# Altium PCB KATADC_V1-3.PcbDoc (part 5 of 7)
Units mm, origin at the board's own origin, x right, y up, seen from the top; angles counter-clockwise.
Board outline 127 x 85.85 mm, 6 copper layers (Top Layer, InnerPlane1, InnerPlane2, InnerPlane3, InnerPlane4, Bottom Layer), stack 1.255 mm thick; 189 components, 188 nets, 905 pads, 1090 vias.
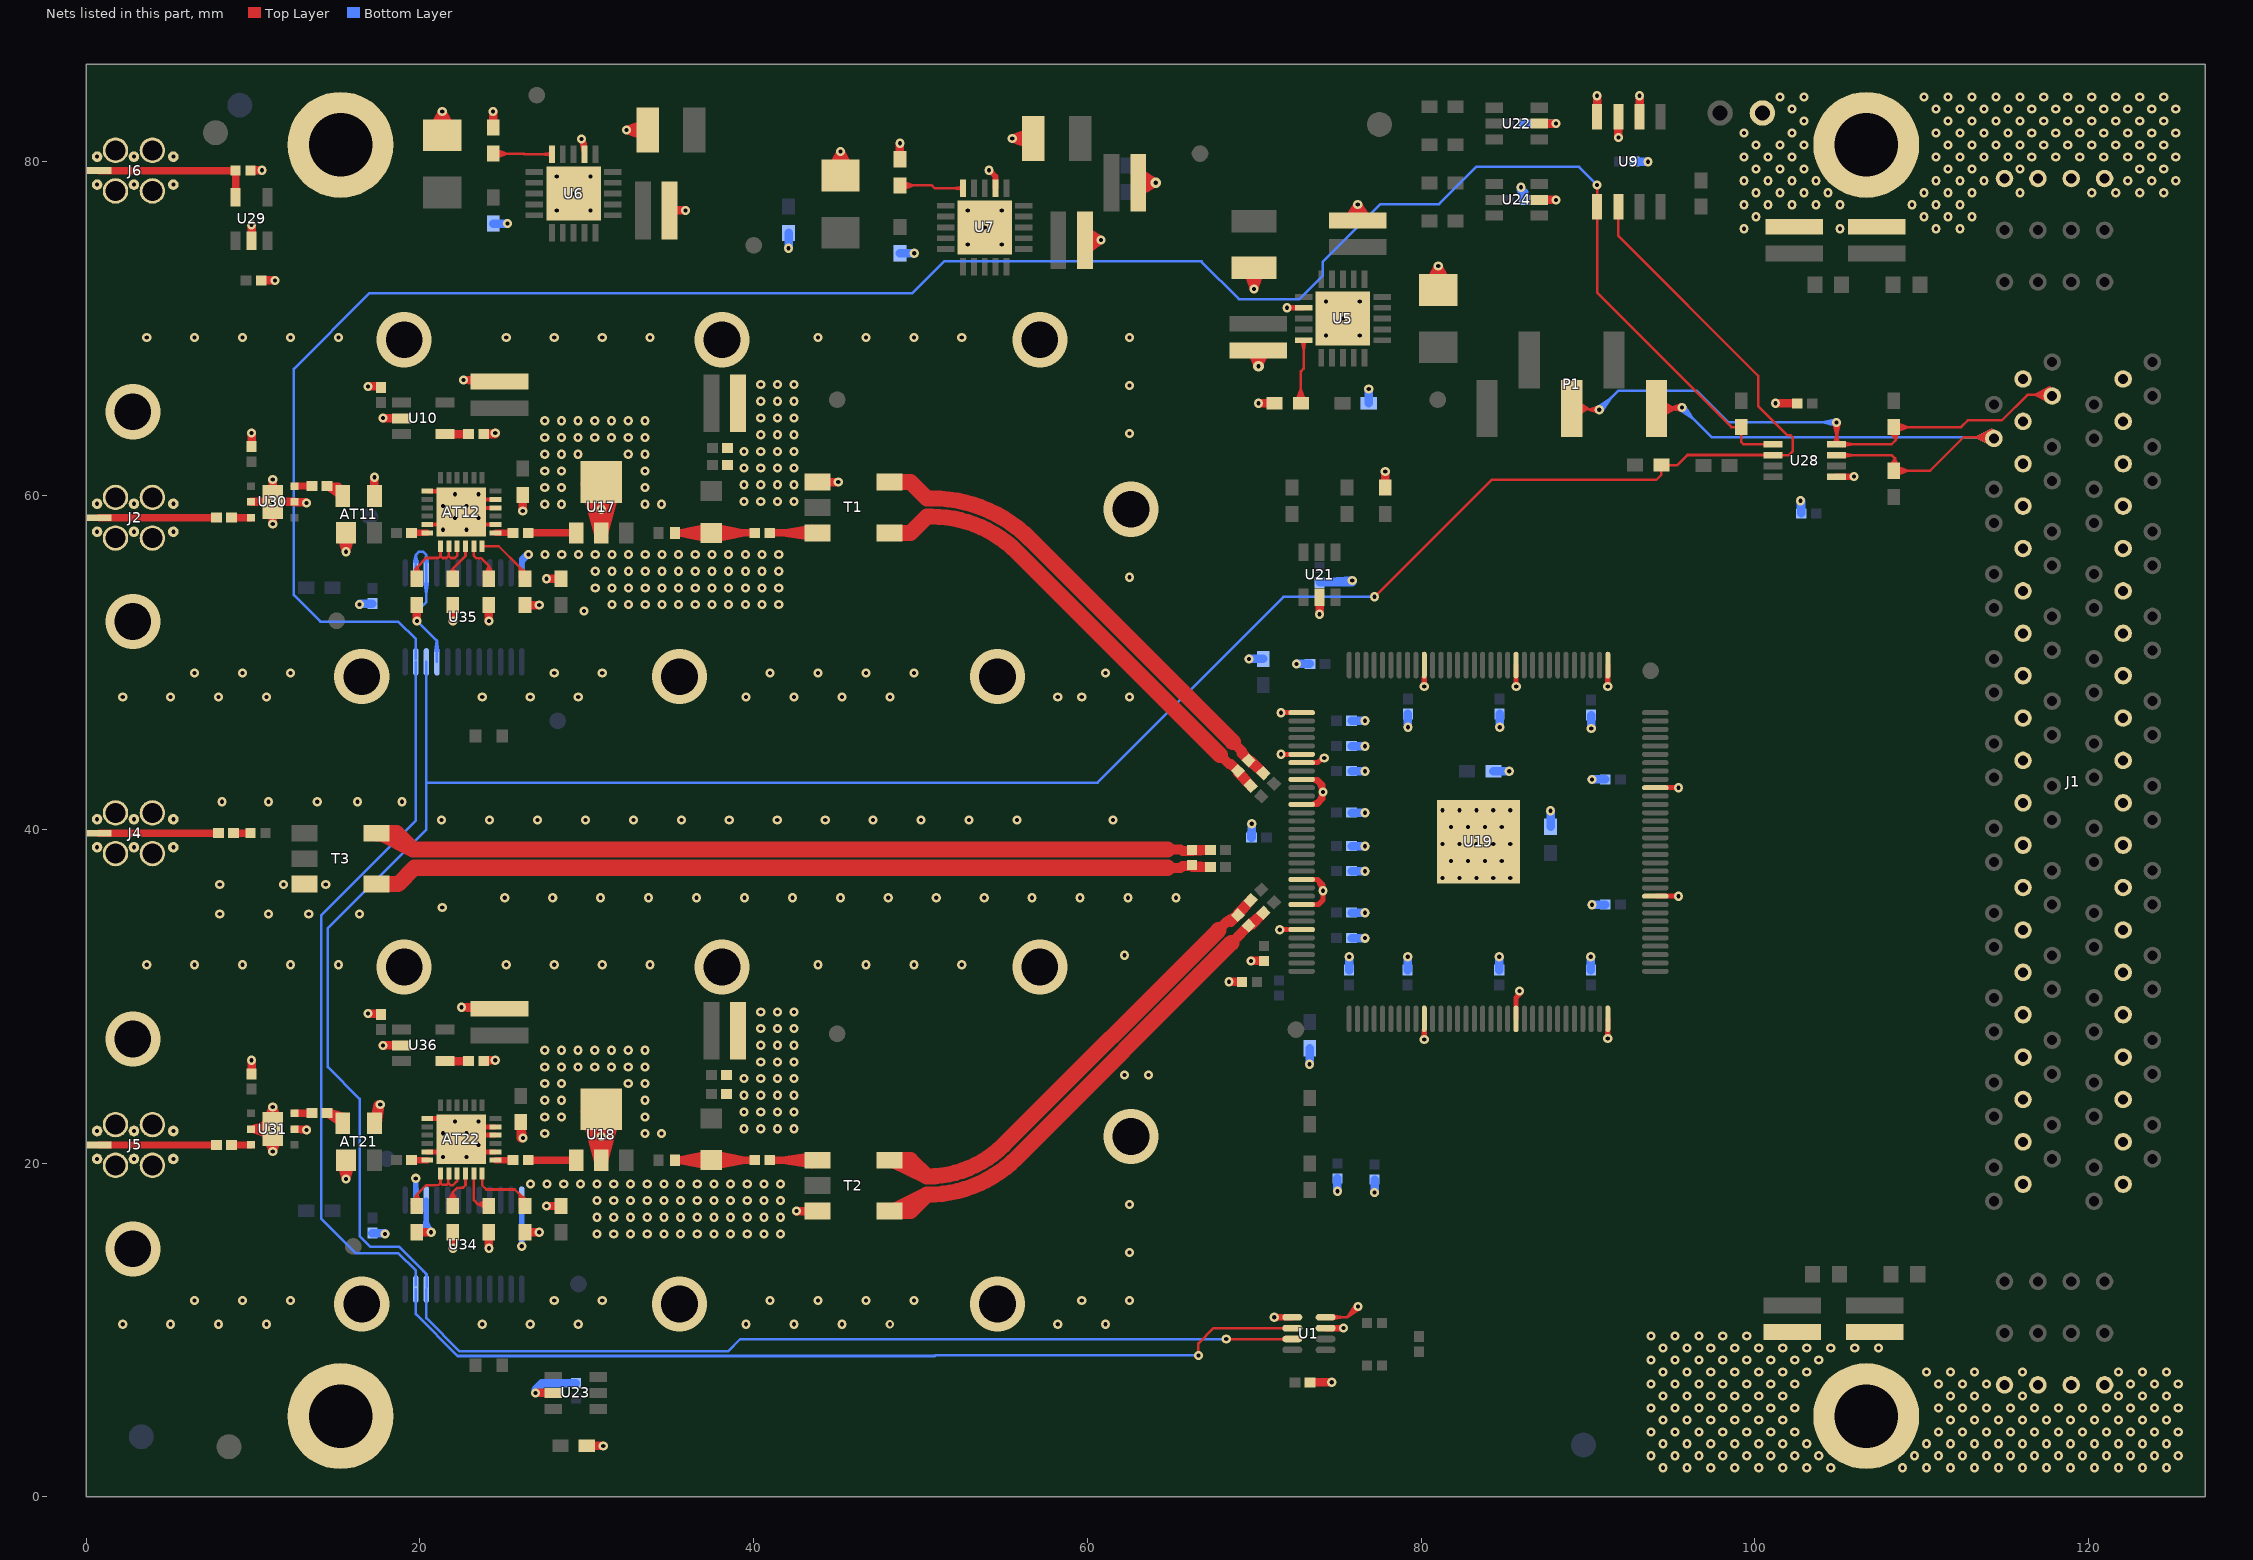
[diagram p9: the nets of this part, all layers, seen from the top]

## Via types
v1: diameter 0.55, hole 0.25, Top Layer to Bottom Layer, tented both sides, 1066 vias
v2: diameter 3.302, hole 2.2, Top Layer to Bottom Layer, tented both sides, 18 vias
v3: diameter 0.65, hole 0.25, Top Layer to Bottom Layer, tented both sides, 4 vias
v4: diameter 0.51, hole 0.25, Top Layer to Bottom Layer, tented both sides, 1 vias
v5: diameter 0.55, hole 0.25, Top Layer to Bottom Layer, 1 vias

## Nets (pads, with @x,y where several pads share a name; then routed paths per layer and width w, separated by ;. In a path a pad name is that pad's centre, name@x,y a point inside that pad or via, vN(x,y) a via of type N, cw(c..) or ccw(c..) an arc to the next point about the centre after c; other vN are vias at no path point) (continued)
GND: AT11.1 AT11.3 AT12.1 AT12.5 AT12.14 AT12.16 AT12.17 AT12.25 AT21.1 AT21.3 AT22.1 AT22.5 AT22.14 AT22.16 AT22.17 AT22.25 C1.2 C2.2 C3.2 C4.2 C5.2 C6.2 C7.2 C8.2 C9.1 C10.1 C11.1 C12.2 C16.2 C17.2 C19.2 C20.2 C21.2 C22.2 C26.2 C27.2 C28.1 C29.1 C30.1 C31.1 C32.2 C34.2 C35.2 C36.2 C37.1 C38.1 C39.2 C59.2 C60.2 C63.2 C65.2 C66.2 C67.2 C68.2 C71.2 C72.2 C74.2 C76.2 C78.2 C79.1 C80.2 C81.2 C82.2 C83.2 C84.2 C85.2 C86.2 C87.2 C88.2 C89.2 C90.2 C91.2 C92.2 C93.2 C96.2 C97.2 C98.2 C99.2 C100.2 C101.2 C102.2 C103.2 C104.2 C105.1 C106.1 C107.1 C108.2 C109.2 C110.2 C111.2 C112.2 C113.2 C114.2 C115.2 C116.2 H1.1 H2.1 H3.1 H4.1 J1.B1 J1.B2 J1.B3 J1.B4 J1.B5 J1.B6 J1.B7 J1.B8 J1.B9 J1.B10 J1.B11 J1.B12 J1.B13 J1.B14 J1.B15 J1.B16 J1.B17 J1.B18 J1.B19 J1.B20 J1.E1 J1.E2 J1.E3 J1.E4 J1.E5 J1.E6 J1.E7 J1.E8 J1.E9 J1.E10 J1.E11 J1.E12 J1.E13 J1.E14 J1.E15 J1.E16 J1.E17 J1.E18 J1.E19 J1.E20 J1.W1 J1.W6 J1.X1 J1.X6 J1.Y1 J1.Y6 J1.Z1 J1.Z6 J2.2 J2.3 J2.4 J2.5 J2.6 J2.7 J2.8 J2.9 J2.10 J2.11 J4.2 J4.3 J4.4 J4.5 J4.6 J4.7 J4.8 J4.9 J4.10 J4.11 J5.2 J5.3 J5.4 J5.5 J5.6 J5.7 J5.8 J5.9 J5.10 J5.11 J6.2 J6.3 J6.4 J6.5 J6.6 J6.7 J6.8 J6.9 J6.10 J6.11 JP1.2 R3.1 R5.1 R6.1 R7.1 R41.1 R43.1 R46.1 R47.2 R48.2 R49.2 T1.1 T2.3 T3.3 U1.3 U1.4 U1.5 U5.12 U5.21 U6.12 U6.21 U7.12 U7.21 U9.2 U9.3 U9.4 U10.2 U17.2 U17.4 U18.2 U18.4 U19.1 U19.6 U19.7 U19.9 U19.12 U19.21 U19.24 U19.27 U19.42 U19.53 U19.64 U19.74 U19.87 U19.97 U19.108 U19.119 U19.129 U21.2 U22.2 U23.2 U24.2 U28.1 U29.2 U30.2 U30.5 U30.7 U31.2 U31.5 U31.7 U34.2 U34.3 U34.12 U35.2 U35.3 U35.12 U35.21 U36.2 | length 500.2
  Top Layer w0.152: U1.4@74.279,10.754 75.565,10.754 ; U1.4@74.679,10.754 75.336,10.754 ; U1.4@74.691,10.631 75.336,10.754 ; U1.4@74.691,10.877 75.336,10.754 ; v1@76.06,11.529 75.565,10.754 ; v1(76.215,11.404) 75.565,10.754 ; v1@76.34,11.249 75.565,10.754
  Top Layer w0.254: AT12.5@20.429,58.264 21.382,58.264 AT12.25@21.664,58.264 ; AT12.1@20.429,60.264 21.536,60.264 AT12.25@21.6,60.2 ; AT12.25@23.264,59.764 23.504,59.764 AT12.17@24.529,59.764 ; AT12.25@23.464,59.264 AT12.16@24.529,59.264 ; AT12.25@23.564,58.264 AT12.14@24.529,58.264
  Top Layer w0.3: AT22.5@20.429,20.672 AT22.25@21.372,20.672 ; AT22.1@20.429,22.672 AT22.25@21.328,22.672 ; AT22.25@23.472,20.672 AT22.14@24.529,20.672 ; AT22.25@23.572,22.172 AT22.17@24.529,22.172 ; AT22.25@23.628,21.672 AT22.16@24.529,21.672 ; U19.27@72.803,33.993 v1(71.526,33.985) ; U19.27@72.839,33.993 v1@71.526,33.993 ; U19.24@72.839,35.493 73.847,35.493 ; U19.21@72.839,36.993 73.802,36.993 ; U19.12@72.839,41.493 73.787,41.493 ; U19.9@72.839,42.993 73.787,42.993 ; U19.7@72.839,43.993 73.799,43.993 ; U19.24@73.489,35.493 73.847,35.493 ; U19.21@73.489,36.993 73.802,36.993 ; U19.7@73.489,43.993 73.799,43.993 ; v1(74.193,44.272) 74.16,44.311 73.838,44.032 73.799,43.993 ; U19.119@80.189,49.843 v1(80.188,48.565) 80.189,49.193 v1(80.188,48.565) U19.119@80.189,49.843 ; U19.53@85.689,28.643 85.689,29.915 ; U19.53@85.689,29.293 85.689,29.915 ; U19.108@85.689,49.843 v1(85.7,48.565) ; U19.108@85.689,49.843 v1@85.689,48.565 ; U19.97@91.189,49.843 v1(91.186,48.565) ; U19.97@91.189,49.843 v1@91.189,48.565 ; U19.74@94.039,35.993 v1(95.428,35.992) 94.689,35.993 v1(95.428,35.992) U19.74@94.151,35.993 ; U19.87@94.039,42.493 v1(95.428,42.494) 94.689,42.493 v1(95.428,42.494) U19.87@94.151,42.493 ; v1(71.526,33.985) v1@71.526,33.993 ; v1(71.526,33.985) 72.189,33.993 v1@71.526,33.993 ; v1@71.603,44.493 U19.6@72.839,44.493 v1(71.603,44.501) ; v1@71.603,44.493 v1(71.603,44.501) ; v1@71.603,44.493 72.189,44.493 v1(71.603,44.501) ; v1(71.603,46.99) v1@71.603,46.993 ; v1(71.603,46.99) U19.1@72.839,46.993 v1@71.603,46.993 ; v1(71.603,46.99) 72.189,46.993 v1@71.603,46.993 ; U19.12@73.489,41.493 74.117,41.823 ; U19.12@73.489,41.493 73.787,41.493 ; U19.12@73.489,41.493 73.787,41.493 ; U19.9@73.489,42.993 74.117,42.663 ; U19.9@73.489,42.993 73.787,42.993 ; U19.9@73.489,42.993 73.787,42.993 ; 73.787,41.493 74.117,41.823 ; 73.787,41.493 v1(74.117,42.24) ; 73.787,42.993 74.117,42.663 ; 73.787,42.993 v1(74.117,42.24) ; 73.802,36.993 74.117,36.678 v1(74.117,36.322) ; 73.802,36.993 v1(74.117,36.322) ; 73.847,35.493 74.117,35.763 ; 74.117,35.763 v1(74.117,36.322) ; 74.117,35.763 v1(74.117,36.322) ; 74.117,41.823 v1(74.117,42.24) ; 74.117,41.823 v1(74.117,42.24) ; 74.117,41.823 v1(74.117,42.24) ; 74.117,41.823 v1(74.117,42.24) ; v1(74.117,42.24) 74.117,42.663 ; v1(74.117,42.24) 74.117,42.663 ; v1(74.117,42.24) 74.117,42.663 ; 85.689,29.915 85.989,30.216 v1(85.903,30.302) 85.689,29.915 ; v1@85.689,48.565 v1(85.7,48.565) ; v1@85.689,48.565 85.689,49.193 v1(85.7,48.565) ; v1(91.186,27.457) v1@91.189,27.457 ; v1(91.186,27.457) 91.189,27.993 v1@91.189,27.457 ; v1(91.186,27.457) U19.64@91.189,28.643 v1@91.189,27.457 ; v1(91.186,48.565) v1@91.189,48.565 ; v1(91.186,48.565) 91.189,49.193 v1@91.189,48.565 ; v1(80.188,27.407) 80.189,27.993 v1(80.188,27.407) U19.42@80.189,28.643 v1(80.188,27.407)
  Top Layer w0.305: U5.12@72.611,71.262 v1(71.958,71.262) U5.12@72.961,71.262 ; v1@29.676,81.283 v1(29.676,81.365) ; v1@29.676,81.283 29.86,81.098 ; v1@29.676,81.283 U6.12@29.86,80.805 ; v1(29.676,81.365) U6.12@29.86,80.455 29.86,81.098 ; v1(29.676,81.365) U6.12@29.86,80.805 ; v1(29.676,81.365) U6.12@29.86,80.805 ; v1(29.676,81.365) U6.12@29.86,80.805 ; U6.12@29.86,80.805 29.86,81.098 ; U6.12@29.86,80.805 29.86,81.098
  Top Layer w0.35: U7.12@54.498,78.423 54.498,79.123 ; U7.12@54.498,78.773 54.498,79.123 ; 54.498,79.123 54.111,79.511 v1(54.102,79.502) 54.498,79.123
  Top Layer w0.4: U1.5@71.879,10.754 v1(71.201,10.754) U1.5@72.279,10.754 ; v1(75.357,10.104) U1.3@74.279,10.104 v1(75.357,10.104) ; v1(75.357,10.104) 74.679,10.104 v1(75.357,10.104) ; v1@105.943,61.128 U28.1@104.897,61.128 v1(105.943,61.138) ; v1@105.943,61.128 v1(105.943,61.138) ; v1@105.943,61.128 105.272,61.128 v1(105.943,61.138)
  Top Layer w0.45: U31.5@12.476,22.032 13.208,22.032 12.501,22.032 v1(13.208,21.971) U31.5@12.476,22.032
  Top Layer w0.452: U31.7@11.115,21.638 v1(11.176,22.032) ; U31.7@11.115,22.426 v1(11.176,22.032) ; U31.2@9.876,22.032 v1(11.176,22.032) ; U31.2@9.876,22.032 v1(11.176,22.032) ; U31.2@9.876,22.032 v1(11.176,22.032) ; U31.2@9.901,22.032 v1(11.176,22.032) ; U31.2@9.901,22.032 v1(11.176,22.032) ; U31.2@9.901,22.032 v1(11.176,22.032) ; U31.2@9.901,22.032 11.114,22.426 v1(11.176,22.032) ; U31.2@9.901,22.032 11.114,21.638 v1(11.176,22.032)
  Top Layer w0.5: U30.2@9.876,59.624 U30.7@11.076,59.624 ; v1(11.176,58.293) U30.7@11.176,58.976 ; U30.7@11.176,60.224 v1(11.176,60.96) ; U30.7@11.424,59.624 U30.5@12.476,59.624 ; U30.5@12.5,59.6 13.171,59.6 v1(13.208,59.563)
  Top Layer w0.508: U29.2@9.906,75.531 v1(9.906,76.234) ; U31.7@11.54,21.558 v1(11.176,20.701) ; U31.7@11.54,22.505 v1(11.176,23.368) ; v1(13.208,21.971) v1@13.208,22.032 ; AT21.3@15.57,20.122 v1(15.57,19.047) ; AT21.3@15.57,20.172 v1(15.57,19.047) ; AT11.3@15.57,57.714 v1(15.57,56.639) ; AT11.3@15.57,57.764 v1(15.57,56.639) ; AT21.3@15.909,20.067 v1(15.57,19.047) ; AT11.3@15.909,57.659 v1(15.57,56.639) ; AT21.1@17.272,22.382 AT21.1@17.462,22.382 ; C110.2@17.653,28.898 17.653,28.956 v1(16.891,28.956) C110.2@17.653,28.923 ; C32.2@17.653,66.49 17.653,66.548 v1(16.891,66.548) C32.2@17.653,66.515 ; U36.2@18.618,27.051 v1(17.78,27.051) U36.2@18.893,27.051 ; U10.2@18.618,64.635 v1(17.78,64.643) 18.885,64.643 U10.2@18.893,64.635 ; C17.2@19.812,53.34 v1(19.812,52.481) C17.2@19.812,53.442 ; C66.2@21.971,15.748 v1(21.971,14.889) C66.2@21.971,15.85 ; C21.2@21.971,53.34 v1(21.971,52.481) C21.2@21.971,53.442 ; C6.2@22.013,81.768 v1(21.336,83.028) ; C108.2@23.515,29.248 v1(22.479,29.337) 24.765,29.337 C108.2@24.765,29.248 ; C1.2@23.515,66.84 v1(22.606,66.929) 24.765,66.929 C1.2@24.765,66.84 ; C109.2@23.818,26.101 23.879,26.162 v1(24.511,26.162) C109.2@23.843,26.101 ; C67.2@24.13,15.748 v1(24.13,14.889) C67.2@24.13,15.85 ; C20.2@24.13,53.34 v1(24.13,52.481) C20.2@24.13,53.442 ; C16.2@26.162,59.944 v1(26.162,59.085) C16.2@26.162,60.046 ; U23.2@27.762,6.223 v1(26.924,6.223) U23.2@27.987,6.223 ; R49.2@29.997,3.048 v1(30.988,3.048) R49.2@30.099,3.048 ; C107.1@33.582,81.5 v1(32.385,81.915) ; C107.1@33.582,82.33 v1(32.385,81.915) ; C107.1@33.652,81.915 v1(32.385,81.915) ; C5.2@34.963,77.089 v1(35.916,77.089) ; T2.3@43.54,17.124 v1(42.562,17.124) T2.3@43.815,17.124 ; C7.2@45.889,79.355 v1(45.212,80.615) ; C82.2@48.768,80.162 v1(48.768,81.123) C82.2@48.768,80.264 ; C106.1@56.696,80.992 v1(55.499,81.407) ; C106.1@56.696,81.822 v1(55.499,81.407) ; C106.1@56.766,81.407 v1(55.499,81.407) ; C8.2@59.855,75.311 v1(60.808,75.311) ; C8.2@59.925,75.875 60.131,75.743 v1(60.808,75.311) ; C8.2@59.975,74.7 60.188,74.857 v1(60.808,75.311) ; C116.2@63.05,78.75 v3(64.1,78.75) ; C116.2@63.225,78.225 63.328,78.287 v3(64.1,78.75) ; C116.2@63.275,79.275 63.353,79.226 v3(64.1,78.75) ; C59.2@69.75,68.75 69.87,68.51 v3(70.25,67.75) ; C59.2@70.25,68.7 v3(70.25,67.75) ; C105.1@70.392,73.587 v1(69.977,72.39) ; C59.2@70.75,68.75 70.63,68.51 v3(70.25,67.75) ; C80.2@71.12,65.532 v1(70.261,65.532) C80.2@71.222,65.532 ; U21.2@73.914,53.67 v1(73.914,52.892) U21.2@73.914,53.895 ; C3.2@75.6,76.5 75.769,76.766 v1(76.2,77.445) ; C3.2@75.7,76.7 C3.2@75.759,76.788 ; C3.2@76.7,76.7 76.641,76.788 v1(76.2,77.445) ; C4.2@81.703,72.497 v1(81.026,73.757) ; U24.2@87.075,77.724 v1(88.078,77.724) U24.2@87.3,77.724 ; U9.3@91.821,82.235 v1(91.821,81.457) U9.3@91.821,82.71 ; U9.2@93.091,82.71 v1(93.091,83.963) U9.2@93.091,83.185 ; C38.1@102.522,65.532 v1(101.249,65.532) C38.1@102.547,65.532 ; R47.2@9.848,79.478 R47.2@9.872,79.502 ; R47.2@9.848,79.478 v1(10.541,79.502) ; R47.2@9.848,79.478 v1(10.541,79.502) ; R47.2@9.872,79.502 v1(10.541,79.502) ; R47.2@9.872,79.502 v1(10.541,79.502) ; v1(9.906,26.162) C100.2@9.906,25.342 v1(9.906,26.162) ; v1(9.906,26.162) 9.906,25.367 v1(9.906,26.162) ; v1(9.906,63.754) C99.2@9.906,62.934 v1(9.906,63.754) ; v1(9.906,63.754) 9.906,62.959 v1(9.906,63.754) ; v1(9.906,76.234) U29.2@9.906,75.281 v1(9.906,76.234) ; v1(11.176,20.701) v1(11.176,22.032) ; v1(11.176,20.701) 10.812,21.558 v1(11.176,20.701) ; v1(11.176,20.701) 11.176,21.632 v1(11.176,22.032) ; v1(11.176,20.701) v1(11.176,22.032) ; v1(11.176,20.701) v1(11.176,22.032) ; v1(11.176,22.032) v1(11.176,23.368) ; v1(11.176,22.032) v1(11.176,23.368) ; v1(11.176,23.368) 10.812,22.505 v1(11.176,23.368) ; v1(11.176,23.368) 11.176,22.432 v1(11.176,23.368) ; v1(11.303,72.898) C79.1@10.483,72.898 v1(11.303,72.898) ; v1(11.303,72.898) 10.508,72.898 v1(11.303,72.898) ; v1(15.57,19.047) 15.232,20.067 v1(15.57,19.047) ; v1(15.57,56.639) 15.232,57.659 v1(15.57,56.639) ; v1(17.272,61.099) AT11.1@17.272,59.974 v1(17.272,61.099) ; v1(17.272,61.099) 17.272,60.177 v1(17.272,61.099) ; AT21.1@17.462,22.382 v1@17.462,23.507 ; AT21.1@17.462,22.382 v1(17.621,23.507) ; v1@17.462,23.507 v1(17.621,23.507) ; v1@17.462,23.507 17.272,22.585 v1(17.621,23.507) ; v1(21.336,83.028) C6.2@21.336,81.597 v1(21.336,83.028) ; v1(21.336,83.028) 20.659,81.768 v1(21.336,83.028) ; v1(24.384,83.028) C81.2@24.384,82.067 v1(24.384,83.028) ; v1(24.384,83.028) 24.384,82.169 v1(24.384,83.028) ; v1@24.511,63.685 v1(24.511,63.754) ; v1@24.511,63.685 C12.2@23.818,63.685 v1(24.511,63.754) ; v1@24.511,63.685 23.843,63.685 v1(24.511,63.754) ; v1@26.035,21.493 C60.2@26.035,22.454 v1(26.171,21.493) ; v1@26.035,21.493 v1(26.171,21.493) ; v1@26.035,21.493 26.035,22.352 v1(26.171,21.493) ; v1(45.068,60.812) T1.1@43.815,60.812 v1(45.068,60.812) ; v1(45.068,60.812) 44.09,60.812 v1(45.068,60.812) ; v1(45.212,80.615) C7.2@45.212,79.184 v1(45.212,80.615) ; v1(45.212,80.615) 44.535,79.355 v1(45.212,80.615) ; v1(69.977,72.39) C105.1@69.977,73.657 v1(69.977,72.39) ; v1(69.977,72.39) 69.562,73.587 v1(69.977,72.39) ; v1(74.646,6.858) C37.1@73.348,6.858 v1(74.646,6.858) ; v1(74.646,6.858) 73.373,6.858 v1(74.646,6.858) ; v1(76.2,77.445) C3.2@76.2,76.492 v1(76.2,77.445) ; v1(77.851,61.438) R48.2@77.851,60.477 v1(77.851,61.438) ; v1(77.851,61.438) 77.851,60.579 v1(77.851,61.438) ; v1(81.026,73.757) C4.2@81.026,72.326 v1(81.026,73.757) ; v1(81.026,73.757) 80.349,72.497 v1(81.026,73.757) ; v1(88.078,82.296) U22.2@87.075,82.296 v1(88.078,82.296) ; v1(88.078,82.296) 87.3,82.296 v1(88.078,82.296) ; v1(90.551,83.963) 90.551,83.185 v1(90.551,83.963) ; v1(90.551,83.963) U9.4@90.551,82.71 v1(90.551,83.963) ; C65.2@19.812,15.85 v1(20.671,15.85) C65.2@19.812,15.85 ; C68.2@26.289,15.85 v1(27.148,15.85) C68.2@26.289,15.85 ; C22.2@26.289,53.442 v1(27.148,53.442) C22.2@26.289,53.442 ; v1(27.589,17.424) C63.2@28.448,17.424 v1(27.589,17.424) ; v1(27.589,55.016) C19.2@28.448,55.016 v1(27.589,55.016) ; v1(68.495,30.861) R3.1@69.273,30.861 v1(68.495,30.861) ; v1(69.801,32.111) R7.1@70.579,32.111 v1(69.801,32.111)
  Top Layer w0.864: U18.4@30.069,23.015 v1(30.861,21.59) ; U18.4@30.069,23.015 v1(30.861,21.59) ; U18.4@30.069,23.015 v1(30.861,21.59) ; U18.4@30.069,23.015 v1(30.861,21.59) ; U17.4@30.069,60.607 v1(30.861,59.182) ; U17.4@30.069,60.607 v1(30.861,59.182) ; U17.4@30.069,60.607 v1(30.861,59.182) ; U17.4@30.069,60.607 v1(30.861,59.182) ; U18.2@30.861,20.172 v1(30.861,21.59) ; U18.2@30.861,20.172 31.672,23.111 v1(30.861,21.59) ; U18.2@30.861,20.172 30.05,23.111 v1(30.861,21.59) ; U18.2@30.861,20.172 v1(30.861,21.59) ; U18.2@30.861,20.172 v1(30.861,21.59) ; U18.2@30.861,20.172 v1(30.861,21.59) ; U18.2@30.861,20.376 v1(30.861,21.59) ; U18.2@30.861,20.376 31.671,23.103 v1(30.861,21.59) ; U18.2@30.861,20.376 30.051,23.103 v1(30.861,21.59) ; U18.2@30.861,20.376 v1(30.861,21.59) ; U18.2@30.861,20.376 v1(30.861,21.59) ; U18.2@30.861,20.376 v1(30.861,21.59) ; v1(30.861,21.59) 31.653,23.015 v1(30.861,21.59) ; U17.2@30.861,57.764 v1(30.861,59.182) ; U17.2@30.861,57.764 31.672,60.703 v1(30.861,59.182) ; U17.2@30.861,57.764 30.05,60.703 v1(30.861,59.182) ; U17.2@30.861,57.764 v1(30.861,59.182) ; U17.2@30.861,57.764 v1(30.861,59.182) ; U17.2@30.861,57.968 v1(30.861,59.182) ; U17.2@30.861,57.968 31.671,60.695 v1(30.861,59.182) ; U17.2@30.861,57.968 30.051,60.695 v1(30.861,59.182) ; U17.2@30.861,57.968 v1(30.861,59.182) ; U17.2@30.861,57.968 v1(30.861,59.182) ; v1(30.861,59.182) 31.653,60.607 v1(30.861,59.182)
  Bottom Layer w0.152: U35.2@19.66,56.042 19.748,56.451 ; U35.2@19.748,55.372 19.748,56.451 ; U35.2@19.748,56.032 19.748,56.451 ; U35.2@19.837,56.042 19.748,56.451 ; U35.3@20.295,54.705 20.383,54.089 ; U35.3@20.295,56.042 20.383,56.451 ; U35.3@20.383,54.712 20.383,54.089 ; U35.3@20.383,56.032 20.383,56.451 ; U35.3@20.472,54.705 20.383,54.089 ; U35.3@20.472,56.042 20.383,56.451 ; U35.21@20.93,50.705 21.018,51.321 ; U35.21@21.018,50.038 21.018,51.282 ; U35.21@21.018,50.698 21.018,51.321 ; 21.025,51.25 21.025,51.275 21.018,51.282 ; U35.21@21.107,50.705 21.018,51.321 ; 19.748,56.451 19.939,56.642 20.193,56.642 20.383,56.451 ; 20.383,56.451 U35.3@20.383,55.372 20.383,53.628 19.8,53.044 19.8,52.5 19.815,52.485 21.018,51.282
  Bottom Layer w0.33: U34.3@20.383,17.12 20.383,16.487 ; U34.3@20.383,17.78 20.383,16.487 ; v1(26.098,15.014) U34.12@26.098,17.78 ; 26.098,15.964 U34.12@26.098,17.12 ; U35.12@26.098,55.372 26.098,56.197 ; v1(19.748,19.083) U34.2@19.748,17.78 v1(19.748,19.083) ; v1(19.748,19.083) 19.748,18.44 v1(19.748,19.083) ; 20.359,16.463 20.383,16.487 ; 20.359,16.463 20.359,16.161 v1(20.671,15.85) 20.359,16.463 ; 26.098,56.197 v1@26.37,56.469 ; 26.098,56.197 v1(26.5,56.469) ; v1@26.37,56.469 v1(26.5,56.469) ; v1@26.37,56.469 26.098,56.032 v1(26.5,56.469)
  Bottom Layer w0.508: v1(16.383,53.467) v1@16.383,53.525 ; C35.2@17.145,15.806 17.907,15.806 v1(17.907,15.748) ; 27.513,6.8 C31.1@29.337,6.8 27.305,6.8 ; C10.1@42.088,75.641 v1(42.088,74.828) C10.1@42.088,75.743 ; C76.2@73.312,49.911 v1(72.534,49.911) C76.2@73.337,49.911 ; C11.1@73.32,26.779 v1(73.32,25.92) C11.1@73.32,26.88 ; C29.1@73.914,54.795 75.875,54.795 v1(75.875,54.918) C29.1@73.962,54.795 ; v1(74.981,18.305) R5.1@74.981,19.083 ; C74.2@75.837,33.477 v1(76.64,33.477) C74.2@75.862,33.477 ; C89.2@79.207,46.896 v1(79.207,46.118) C89.2@79.207,46.921 ; C92.2@84.709,46.896 v1(84.709,46.118) C92.2@84.709,46.921 ; C28.1@86.175,82.296 v1(88.078,82.296) ; C28.1@86.177,82.296 v1(88.078,82.296) ; v1@88.024,82.296 86.2,82.296 v1(88.078,82.296) ; C111.2@90.195,46.82 v1(90.195,46.042) C111.2@90.195,46.845 ; C88.2@91.016,35.484 v1(90.238,35.484) C88.2@91.041,35.484 ; C90.2@91.016,42.993 v1(90.238,42.993) C90.2@91.041,42.993 ; v1@16.383,53.525 C34.2@17.145,53.525 v1@16.383,53.525 ; 27.305,6.8 26.924,6.419 v1(26.924,6.223) 27.305,6.8 ; v1(75.692,32.368) C84.2@75.692,31.565 v1(75.692,32.368) ; v1(75.692,32.368) 75.692,31.59 v1(75.692,32.368) ; v1(76.632,44.983) C115.2@75.837,44.983 v1(76.632,44.983) ; v1(76.632,44.983) 75.862,44.983 v1(76.632,44.983) ; v1(76.64,35.001) C78.2@75.837,35.001 v1(76.64,35.001) ; v1(76.64,35.001) 75.862,35.001 v1(76.64,35.001) ; v1(76.64,37.49) C113.2@75.837,37.49 v1(76.64,37.49) ; v1(76.64,37.49) 75.862,37.49 v1(76.64,37.49) ; v1(76.64,38.989) C85.2@75.837,38.989 v1(76.64,38.989) ; v1(76.64,38.989) 75.862,38.989 v1(76.64,38.989) ; v1(76.64,43.485) C114.2@75.837,43.485 v1(76.64,43.485) ; v1(76.64,43.485) 75.862,43.485 v1(76.64,43.485) ; v1(76.64,46.507) C98.2@75.837,46.507 v1(76.64,46.507) ; v1(76.64,46.507) 75.862,46.507 v1(76.64,46.507) ; v1(76.641,40.997) C96.2@75.837,40.996 v1(76.641,40.997) ; v1(76.641,40.997) 75.862,40.996 v1(76.641,40.997) ; v1(79.197,32.368) C86.2@79.197,31.565 v1(79.197,32.368) ; v1(79.197,32.368) 79.197,31.59 v1(79.197,32.368) ; v1(84.684,32.368) C87.2@84.684,31.565 v1(84.684,32.368) ; v1(84.684,32.368) 84.684,31.59 v1(84.684,32.368) ; v1(85.288,43.485) C91.2@84.328,43.485 v1(85.288,43.485) ; v1(85.288,43.485) 84.43,43.485 v1(85.288,43.485) ; v1@85.979,78.37 v1(85.979,78.486) ; v1@85.979,78.37 86.175,78.174 ; v1@85.979,78.37 86.15,77.724 v1(85.979,78.486) ; v1(85.979,78.486) C30.1@86.175,77.724 ; v1(85.979,78.486) C30.1@86.175,77.724 ; C30.1@86.175,77.724 86.175,78.174 ; C30.1@86.175,77.724 86.175,78.174 ; v1(87.757,41.118) C93.2@87.757,40.157 v1(87.757,41.118) ; v1(87.757,41.118) 87.757,40.259 v1(87.757,41.118) ; v1(90.17,32.368) C112.2@90.17,31.565 v1(90.17,32.368) ; v1(90.17,32.368) 90.17,31.59 v1(90.17,32.368) ; v1(93.599,80.01) C36.2@92.779,80.01 v1(93.599,80.01) ; v1(93.599,80.01) 92.804,80.01 v1(93.599,80.01) ; R43.1@24.384,76.302 v1(25.243,76.302) R43.1@24.384,76.302 ; R46.1@48.768,74.524 v1(49.627,74.524) R46.1@48.768,74.524 ; v1(69.685,50.213) C9.1@70.543,50.213 v1(69.685,50.213) ; C97.2@69.832,39.497 69.85,39.497 v1(69.85,40.335) C97.2@69.832,39.497 ; R41.1@76.86,65.532 v1(76.86,66.391) R41.1@76.86,65.532 ; v1(77.216,18.229) R6.1@77.216,19.006 v1(77.216,18.229) ; v1(102.743,59.69) 102.786,59.69 C83.2@102.786,58.937 v1(102.743,59.69)
  other v1: 94.491,1.734 95.928,1.734 97.364,1.734 98.801,1.734 100.238,1.734 101.675,1.734 103.112,1.734 104.549,1.734 108.859,1.734 110.296,1.734 111.733,1.734 113.17,1.734 114.607,1.734 116.043,1.734 117.48,1.734 118.917,1.734 120.354,1.734 121.791,1.734 123.228,1.734 124.664,1.734 93.772,2.453 95.209,2.453 96.646,2.453 98.083,2.453 99.52,2.453 100.957,2.453 102.393,2.453 103.83,2.453 109.578,2.453 111.014,2.453 112.451,2.453 113.888,2.453 115.325,2.453 116.762,2.453 118.199,2.453 119.635,2.453 121.072,2.453 122.509,2.453 123.946,2.453 125.383,2.453 94.491,3.171 95.928,3.171 97.364,3.171 98.801,3.171 100.238,3.171 101.675,3.171 103.112,3.171 110.296,3.171 111.733,3.171 113.17,3.171 114.607,3.171 116.043,3.171 117.48,3.171 118.917,3.171 120.354,3.171 121.791,3.171 123.228,3.171 124.664,3.171 93.772,3.89 95.209,3.89 96.646,3.89 98.083,3.89 99.52,3.89 100.957,3.89 102.393,3.89 111.014,3.89 112.451,3.89 113.888,3.89 115.325,3.89 116.762,3.89 118.199,3.89 119.635,3.89 121.072,3.89 122.509,3.89 123.946,3.89 125.383,3.89 94.491,4.608 95.928,4.608 97.364,4.608 98.801,4.608 100.238,4.608 101.675,4.608 111.733,4.608 113.17,4.608 114.607,4.608 116.043,4.608 117.48,4.608 118.917,4.608 120.354,4.608 121.791,4.608 123.228,4.608 124.664,4.608 93.772,5.327 95.209,5.327 96.646,5.327 98.083,5.327 99.52,5.327 100.957,5.327 102.393,5.327 111.014,5.327 112.451,5.327 113.888,5.327 115.325,5.327 116.762,5.327 118.199,5.327 119.635,5.327 121.072,5.327 122.509,5.327 123.946,5.327 125.383,5.327 94.491,6.045 95.928,6.045 97.364,6.045 98.801,6.045 100.238,6.045 101.675,6.045 111.733,6.045 113.17,6.045 116.043,6.045 121.791,6.045 123.228,6.045 124.664,6.045 93.772,6.763 95.209,6.763 96.646,6.763 98.083,6.763 99.52,6.763 100.957,6.763 102.393,6.763 111.014,6.763 112.451,6.763 113.888,6.763 122.509,6.763 123.946,6.763 125.383,6.763 94.491,7.482 95.928,7.482 97.364,7.482 98.801,7.482 100.238,7.482 101.675,7.482 103.112,7.482 110.296,7.482 111.733,7.482 113.17,7.482 116.043,7.482 121.791,7.482 123.228,7.482 124.664,7.482 93.772,8.2 95.209,8.2 96.646,8.2 98.083,8.2 99.52,8.2 100.957,8.2 102.393,8.2 103.83,8.2 94.491,8.919 95.928,8.919 97.364,8.919 98.801,8.919 100.238,8.919 101.675,8.919 103.112,8.919 104.549,8.919 105.986,8.919 107.422,8.919 93.772,9.637 95.209,9.637 96.646,9.637 98.083,9.637 99.52,9.637 2.183,10.333 5.057,10.333 7.931,10.333 10.804,10.333 23.736,10.333 26.609,10.333 29.483,10.333 39.541,10.333 42.415,10.333 45.288,10.333 58.22,10.333 61.094,10.333 6.494,11.77 9.367,11.77 12.241,11.77 28.046,11.77 30.92,11.77 40.978,11.77 43.852,11.77 46.725,11.77 49.599,11.77 59.657,11.77 62.531,11.77 62.531,14.644 30.617,15.75 31.617,15.75 32.617,15.75 33.617,15.75 34.617,15.75 35.617,15.75 36.617,15.75 37.617,15.75 38.617,15.75 39.617,15.75 40.617,15.75 41.617,15.75 30.617,16.75 31.617,16.75 32.617,16.75 33.617,16.75 34.617,16.75 35.617,16.75 36.617,16.75 37.617,16.75 38.617,16.75 39.617,16.75 40.617,16.75 41.617,16.75 62.531,17.518 30.617,17.75 31.617,17.75 32.617,17.75 33.617,17.75 34.617,17.75 35.617,17.75 36.617,17.75 37.617,17.75 38.617,17.75 39.617,17.75 40.617,17.75 41.617,17.75 26.617,18.75 27.617,18.75 28.617,18.75 29.617,18.75 30.617,18.75 31.617,18.75 32.617,18.75 33.617,18.75 34.617,18.75 35.617,18.75 36.617,18.75 37.617,18.75 38.617,18.75 39.617,18.75 40.617,18.75 41.617,18.75 21.382,20.366 22.797,20.366 23.504,21.073 21.382,21.781 22.797,21.781 27.478,21.763 33.478,21.763 34.478,21.763 39.426,22.059 40.426,22.059 41.426,22.059 42.426,22.059 22.089,22.488 23.504,22.488 27.478,22.763 28.478,22.763 33.478,22.763 39.426,23.059 40.426,23.059 41.426,23.059 42.426,23.059 27.478,23.763 28.478,23.763 33.478,23.763 39.426,24.059 40.426,24.059 41.426,24.059 42.426,24.059 27.478,24.763 28.478,24.763 32.478,24.763 33.478,24.763 39.426,25.059 40.426,25.059 41.426,25.059 42.426,25.059 62.222,25.273 63.658,25.273 27.478,25.763 28.478,25.763 29.478,25.763 30.478,25.763 31.478,25.763 32.478,25.763 33.478,25.763 40.426,26.059 41.426,26.059 42.426,26.059 27.478,26.763 28.478,26.763 29.478,26.763 30.478,26.763 31.478,26.763 32.478,26.763 33.478,26.763 40.426,27.059 41.426,27.059 42.426,27.059 40.426,28.059 41.426,28.059 42.426,28.059 40.426,29.059 41.426,29.059 42.426,29.059 3.62,31.886 6.494,31.886 9.367,31.886 12.241,31.886 15.115,31.886 25.173,31.886 28.046,31.886 30.92,31.886 33.794,31.886 43.852,31.886 46.725,31.886 49.599,31.886 52.473,31.886 62.222,32.457 8.001,34.925 10.922,34.925 13.335,34.925 16.383,34.925 21.336,35.306 25.079,35.895 27.952,35.895 30.826,35.895 33.7,35.895 36.573,35.895 39.447,35.895 42.321,35.895 45.194,35.895 48.068,35.895 50.942,35.895 53.815,35.895 56.689,35.895 59.563,35.895 62.436,35.895 65.31,35.895 8.001,36.703 11.811,36.703 14.351,36.703 81.28,37.084 82.296,37.084 83.312,37.084 84.328,37.084 85.344,37.084 81.788,38.1 82.804,38.1 83.82,38.1 84.836,38.1 81.28,39.116 82.296,39.116 83.312,39.116 84.328,39.116 85.344,39.116 81.788,40.132 82.804,40.132 83.82,40.132 84.836,40.132 21.297,40.559 24.17,40.559 27.044,40.559 29.918,40.559 32.792,40.559 35.665,40.559 38.539,40.559 41.413,40.559 44.286,40.559 47.16,40.559 50.034,40.559 52.907,40.559 55.781,40.559 61.528,40.559 81.28,41.148 82.296,41.148 83.312,41.148 84.328,41.148 85.344,41.148 8.128,41.656 10.922,41.656 13.843,41.656 16.256,41.656 18.923,41.656 2.183,47.925 5.057,47.925 7.931,47.925 10.804,47.925 23.736,47.925 26.609,47.925 29.483,47.925 39.541,47.925 42.415,47.925 45.288,47.925 48.162,47.925 58.22,47.925 59.657,47.925 62.531,47.925 6.494,49.362 9.367,49.362 12.241,49.362 28.046,49.362 30.92,49.362 40.978,49.362 43.852,49.362 46.725,49.362 49.599,49.362 61.094,49.362 29.821,53.078 31.5,53.469 32.5,53.469 33.5,53.469 34.5,53.469 35.5,53.469 36.5,53.469 37.5,53.469 38.5,53.469 39.5,53.469 40.5,53.469 41.5,53.469 30.5,54.469 31.5,54.469 32.5,54.469 33.5,54.469 34.5,54.469 35.5,54.469 36.5,54.469 37.5,54.469 38.5,54.469 39.5,54.469 40.5,54.469 41.5,54.469 62.531,55.11 30.5,55.469 31.5,55.469 32.5,55.469 33.5,55.469 34.5,55.469 35.5,55.469 36.5,55.469 37.5,55.469 38.5,55.469 39.5,55.469 40.5,55.469 41.5,55.469 27.5,56.469 28.5,56.469 29.5,56.469 30.5,56.469 31.5,56.469 32.5,56.469 33.5,56.469 34.5,56.469 35.5,56.469 36.5,56.469 37.5,56.469 38.5,56.469 39.5,56.469 40.5,56.469 41.5,56.469 21.382,57.958 22.797,57.958 22.089,58.665 23.504,58.665 21.382,59.373 22.797,59.373 27.478,59.482 28.478,59.482 33.478,59.482 34.478,59.482 11.176,59.624 39.426,59.651 40.426,59.651 41.426,59.651 42.426,59.651 22.089,60.08 23.504,60.08 27.478,60.482 28.478,60.482 33.478,60.482 39.426,60.651 40.426,60.651 41.426,60.651 42.426,60.651 27.478,61.482 28.478,61.482 33.478,61.482 39.426,61.651 40.426,61.651 41.426,61.651 42.426,61.651 27.478,62.482 28.478,62.482 29.478,62.482 32.478,62.482 33.478,62.482 39.426,62.651 40.426,62.651 41.426,62.651 42.426,62.651 27.478,63.482 28.478,63.482 29.478,63.482 30.478,63.482 31.478,63.482 32.478,63.482 33.478,63.482 40.426,63.651 41.426,63.651 42.426,63.651 62.531,63.731 27.478,64.482 28.478,64.482 29.478,64.482 30.478,64.482 31.478,64.482 32.478,64.482 33.478,64.482 40.426,64.651 41.426,64.651 42.426,64.651 40.426,65.651 41.426,65.651 42.426,65.651 62.531,66.604 40.426,66.651 41.426,66.651 42.426,66.651 3.62,69.478 6.494,69.478 9.367,69.478 12.241,69.478 15.115,69.478 25.173,69.478 28.046,69.478 30.92,69.478 33.794,69.478 43.852,69.478 46.725,69.478 49.599,69.478 52.473,69.478 62.531,69.478 74.295,69.596 76.327,69.596 75.311,70.612 74.295,71.628 76.327,71.628 52.832,75.057 54.864,75.057 99.36,75.992 105.108,75.992 110.855,75.992 112.292,75.992 53.848,76.073 100.079,76.711 110.137,76.711 111.574,76.711 113.01,76.711 28.194,77.089 30.226,77.089 52.832,77.089 54.864,77.089 99.36,77.429 100.797,77.429 102.234,77.429 103.671,77.429 105.108,77.429 109.418,77.429 110.855,77.429 112.292,77.429 29.21,78.105 100.079,78.148 101.516,78.148 102.952,78.148 104.389,78.148 110.137,78.148 111.574,78.148 113.01,78.148 115.884,78.148 120.195,78.148 121.631,78.148 123.068,78.148 124.505,78.148 99.36,78.866 100.797,78.866 102.234,78.866 103.671,78.866 110.855,78.866 112.292,78.866 113.729,78.866 122.35,78.866 123.787,78.866 125.223,78.866 28.194,79.121 30.226,79.121 100.079,79.584 101.516,79.584 102.952,79.584 111.574,79.584 113.01,79.584 115.884,79.584 123.068,79.584 124.505,79.584 99.36,80.303 100.797,80.303 102.234,80.303 110.855,80.303 112.292,80.303 113.729,80.303 115.166,80.303 116.602,80.303 118.039,80.303 119.476,80.303 120.913,80.303 122.35,80.303 123.787,80.303 125.223,80.303 100.079,81.021 101.516,81.021 102.952,81.021 111.574,81.021 113.01,81.021 114.447,81.021 115.884,81.021 117.321,81.021 118.758,81.021 120.195,81.021 121.631,81.021 123.068,81.021 124.505,81.021 99.36,81.74 102.234,81.74 110.855,81.74 112.292,81.74 113.729,81.74 115.166,81.74 116.602,81.74 118.039,81.74 119.476,81.74 120.913,81.74 122.35,81.74 123.787,81.74 125.223,81.74 102.952,82.458 111.574,82.458 113.01,82.458 114.447,82.458 115.884,82.458 117.321,82.458 118.758,82.458 120.195,82.458 121.631,82.458 123.068,82.458 124.505,82.458 102.234,83.177 110.855,83.177 112.292,83.177 113.729,83.177 115.166,83.177 116.602,83.177 118.039,83.177 119.476,83.177 120.913,83.177 122.35,83.177 123.787,83.177 125.223,83.177 101.516,83.895 102.952,83.895 110.137,83.895 111.574,83.895 113.01,83.895 114.447,83.895 115.884,83.895 117.321,83.895 118.758,83.895 120.195,83.895 121.631,83.895 123.068,83.895 124.505,83.895
  other v2: 16.51,11.557 35.56,11.557 54.61,11.557 2.794,14.859 62.611,21.59 2.794,27.432 19.05,31.75 38.1,31.75 57.15,31.75 16.51,49.149 35.56,49.149 54.61,49.149 2.794,52.451 62.611,59.182 2.794,65.024 19.05,69.342 38.1,69.342 57.15,69.342
  other v4: 48.162,10.333
I2C_SCL: J1.F2 P1.1 R16.2 U28.3 | length 66
  Top Layer w0.152: P1.1@94.107,65.215 95.567,65.215 v1(95.631,65.278) 94.794,65.215 ; P1.1@94.112,65.113 95.199,65.215 ; P1.1@94.112,65.316 95.199,65.215 ; P1.1@94.137,64.962 95.199,65.215 ; P1.1@94.137,65.467 95.199,65.215 ; P1.1@94.183,64.815 95.199,65.215 ; P1.1@94.183,65.614 95.199,65.215 ; P1.1@94.25,64.674 95.199,65.215 ; P1.1@94.25,65.755 95.199,65.215 ; v1@95.593,65.473 94.794,65.215 ; v1@95.622,65.079 94.794,65.215 ; U28.3@104.897,62.428 108.204,62.428 108.402,62.23 ; U28.3@105.272,62.428 105.929,62.428 ; U28.3@105.284,62.305 105.929,62.428 ; U28.3@105.284,62.551 105.929,62.428 ; R16.2@108.045,61.7 108.402,62.23 ; R16.2@108.183,61.63 108.402,62.23 ; R16.2@108.331,61.595 108.402,62.23 ; R16.2@108.345,61.342 109.169,61.493 ; R16.2@108.345,61.645 109.169,61.493 ; R16.2@108.386,61.194 109.169,61.493 ; R16.2@108.386,61.793 109.169,61.493 ; R16.2@108.483,61.596 108.402,62.23 ; R16.2@108.633,61.634 108.402,62.23 ; J1.F2@114.189,63.039 113.293,63.5 ; 114.189,63.96 113.293,63.5 ; J1.F2@114.249,63.183 113.293,63.5 ; J1.F2@114.249,63.817 113.293,63.5 ; J1.F2@114.286,63.332 113.293,63.5 ; J1.F2@114.286,63.668 113.293,63.5 ; J1.F2@114.3,63.5 112.522,63.5 110.515,61.493 R16.2@108.331,61.493 108.402,61.564 108.402,62.23
  Bottom Layer w0.152: v1@95.505,65.124 96.331,64.578 v1@95.785,65.404 ; v1(95.631,65.278) 97.409,63.5 J1.F2@114.3,63.5 ; J1.F2@114.189,63.039 113.293,63.5 ; 114.189,63.96 113.293,63.5 ; J1.F2@114.249,63.183 113.293,63.5 ; J1.F2@114.249,63.817 113.293,63.5 ; J1.F2@114.286,63.332 113.293,63.5 ; J1.F2@114.286,63.668 113.293,63.5
I2C_SCL_5: R24.1 U1.7 U9.6 U28.6 U34.22 U35.22 | length 208.5
  Top Layer w0.152: v1(68.318,9.452) 72.398,9.452 U1.7@72.4,9.45 ; v1(77.216,53.934) 84.226,60.944 94.094,60.944 94.4,61.25 R24.1@94.4,61.8 ; U9.6@91.825,77.45 91.821,77.446 U9.6@91.821,77.31 91.821,75.565 100.203,67.183 100.203,65.372 101.96,63.614 102.156,63.614 102.275,63.496 102.275,63.475 ; R24.1@94.425,61.8 94.427,61.802 94.454,61.829 95.356,61.829 95.96,62.433 U28.6@101.133,62.433 ; U28.6@101.472,62.428 102.046,62.428 102.285,62.667 102.285,63.485
  Bottom Layer w0.152: U34.22@20.383,12.446 20.383,10.708 22.376,8.716 38.457,8.716 39.193,9.452 v1(68.318,9.452) ; 20.383,13.348 20.203,13.528 ; 20.383,48.755 U35.22@20.383,49.378 ; U35.22@20.383,50.038 20.383,42.799 ; U34.22@20.4,12.575 20.4,13.331 20.203,13.528 ; v1(77.216,53.934) 71.748,53.934 60.612,42.799 20.383,42.799 ; 20.203,13.528 18.745,14.986 17.017,14.986 16.383,15.62 16.383,23.849 14.478,25.754 14.478,34.074 20.383,39.98 20.383,42.799
I2C_SDA: J1.D2 P1.3 R15.2 U28.4 | length 65.9
  Top Layer w0.152: P1.3@89.027,65.215 90.001,65.215 ; P1.3@89.032,65.113 90.001,65.215 ; P1.3@89.032,65.316 90.001,65.215 ; P1.3@89.06,64.963 90.001,65.215 ; P1.3@89.06,65.466 90.001,65.215 ; P1.3@89.112,64.817 90.001,65.215 ; P1.3@89.112,65.612 90.001,65.215 ; P1.3@89.187,64.679 90.001,65.215 ; P1.3@89.187,65.75 90.001,65.215 ; v1@90.646,64.955 90.064,65.151 ; v1@90.646,65.347 90.064,65.151 ; v1@104.705,64.366 104.897,63.555 ; U28.4@104.774,63.09 104.897,63.735 U28.4@105.02,63.09 ; v1@105.099,64.364 104.897,63.555 ; U28.4@105.272,63.078 105.929,63.078 ; U28.4@105.284,62.955 105.929,63.078 ; U28.4@105.284,63.201 105.929,63.078 ; R15.2@108.051,63.887 108.458,63.332 ; R15.2@108.185,63.963 108.458,63.332 ; R15.2@108.331,64.008 108.458,63.332 ; R15.2@108.345,63.958 109.169,64.11 ; R15.2@108.345,64.261 109.169,64.11 ; R15.2@108.386,63.81 109.169,64.11 ; R15.2@108.386,64.409 109.169,64.11 ; R15.2@108.483,64.019 108.458,63.332 ; R15.2@108.636,63.997 108.458,63.332 ; J1.D2@117.689,65.579 116.793,66.04 ; 117.689,66.5 116.793,66.04 ; J1.D2@117.749,65.723 116.793,66.04 ; J1.D2@117.749,66.357 116.793,66.04 ; J1.D2@117.786,65.872 116.793,66.04 ; J1.D2@117.786,66.208 116.793,66.04 ; J1.D2@117.8,66.04 116.332,66.04 114.808,64.516 112.776,64.516 112.37,64.11 R15.2@108.458,64.11 ; 90.001,65.215 90.064,65.151 ; 90.064,65.151 v1(90.678,65.151) 90.064,65.151 ; 104.897,63.555 v1(104.902,64.389) 104.897,64.384 U28.4@104.897,63.078 108.204,63.078 108.458,63.332 ; 108.458,63.332 R15.2@108.458,64.11 ; R15.2@108.458,64.11 R15.2@108.331,64.11 109.169,64.11
  Bottom Layer w0.152: v1@90.552,65.305 91.378,65.851 v1@90.832,65.025 ; v1(90.678,65.151) 91.821,66.294 96.52,66.294 98.425,64.389 v1(104.902,64.389) ; v1@104.878,64.192 104.068,64.389 v1@104.878,64.586
I2C_SDA_5: R25.1 U1.6 U9.5 U28.5 U34.23 U35.23 | length 230
  Top Layer w0.152: v1(66.65,8.468) 66.65,9.195 67.559,10.104 U1.6@72.279,10.104 ; U9.5@90.551,77.31 v1(90.551,78.613) v1@90.551,78.626 ; U9.5@90.65,77.375 90.568,77.293 90.551,77.276 90.551,72.161 98.603,64.11 R25.1@99.11,64.11 ; R25.1@99.2,64.075 99.187,64.062 99.187,63.205 99.314,63.078 U28.5@101.047,63.078
  Bottom Layer w0.152: U34.23@19.748,12.446 19.748,10.948 22.26,8.436 50.858,8.436 50.89,8.468 v1(66.65,8.468) ; U34.23@19.748,12.674 19.748,13.549 18.693,14.605 16.146,14.605 14.072,16.68 14.072,34.845 19.748,40.522 U35.23@19.748,50.038 ; U35.23@19.748,50.224 19.748,51.395 18.693,52.451 14.028,52.451 12.446,54.033 12.446,67.595 16.987,72.136 49.511,72.136 51.416,74.041 66.85,74.041 ; 66.85,74 69.075,71.775 72.7,71.775 74.1,73.175 ; 74.1,73.2 74.1,74.004 77.571,77.475 81.075,77.475 83.3,79.7 89.464,79.7 v1(90.551,78.613)
NetAT11_4: AT11.4 C14.2 | length 8.2
  Top Layer w0.443: AT11.4@15.256,59.984 C14.2@14.445,60.579 ; AT11.4@15.258,59.983 C14.2@14.42,60.579 ; AT11.4@15.367,59.974 15.367,60.325 AT11.4@15.113,60.579 ; AT11.4@15.431,60.391 C14.2@14.42,60.579 ; AT11.4@15.433,60.39 C14.2@14.445,60.579 ; C14.2@14.42,60.579 AT11.4@15.113,60.579 ; C14.2@14.42,60.579 15.367,60.177 C14.2@14.445,60.579 ; C14.2@14.445,60.579 AT11.4@15.113,60.579
NetAT12_6: AT12.6 C18.2 | length 3.3
  Top Layer w0.381: C18.2@19.5,57.764 AT12.6@20.429,57.764 19.525,57.764 20.229,57.764 C18.2@19.5,57.764
NetAT12_7: AT12.7 AT12.8 AT12.9 C17.1 | length 9.4
  Top Layer w0.152: C17.1@19.518,55.198 19.812,55.702 ; C17.1@19.661,55.138 19.812,55.702 ; C17.1@19.812,55.016 19.812,55.702 ; C17.1@19.812,55.118 19.812,55.702 ; C17.1@19.963,55.138 19.812,55.702 ; C17.1@20.106,55.198 19.812,55.702 ; AT12.7@21.229,56.764 21.229,56.388 ; AT12.7@21.229,56.964 21.229,56.388 ; AT12.8@21.729,56.764 21.717,56.388 ; AT12.8@21.729,56.964 21.717,56.952 21.717,56.388 ; AT12.9@22.229,56.764 22.225,56.388 ; AT12.9@22.229,56.964 22.225,56.96 22.225,56.388 ; 19.812,55.702 20.371,56.261 21.102,56.261 21.229,56.388 ; 21.229,56.388 21.356,56.261 21.59,56.261 21.717,56.388 ; 21.717,56.388 21.844,56.261 22.098,56.261 22.225,56.388
NetAT12_10: AT12.10 C21.1 | length 5.2
  Top Layer w0.152: C21.1@21.68,55.209 21.971,55.63 ; C21.1@21.82,55.141 21.971,55.63 ; C21.1@21.971,55.016 21.971,55.63 ; C21.1@21.971,55.118 21.971,55.63 ; C21.1@22.122,55.141 21.971,55.63 ; C21.1@22.262,55.209 21.971,55.63 ; AT12.10@22.729,56.764 22.729,56.388 ; AT12.10@22.729,56.964 22.729,56.388 ; 21.971,55.63 22.729,56.388
NetAT12_11: AT12.11 C20.1 | length 6.2
  Top Layer w0.152: AT12.11@23.229,56.764 23.229,56.388 ; AT12.11@23.229,56.964 23.229,56.388 ; C20.1@23.833,55.188 24.13,55.781 ; C20.1@23.979,55.136 24.13,55.781 ; C20.1@24.13,55.016 24.13,55.781 ; C20.1@24.13,55.118 24.13,55.781 ; C20.1@24.281,55.136 24.13,55.781 ; C20.1@24.427,55.188 24.13,55.781 ; 23.229,56.388 23.368,56.249 23.662,56.249 24.13,55.781
NetAT12_12: AT12.12 C22.1 | length 7.1
  Top Layer w0.152: AT12.12@23.729,56.964 24.722,56.964 25.984,55.702 ; C22.1@25.993,55.043 25.984,55.702 ; C22.1@26.147,55.064 25.984,55.702 ; C22.1@26.289,55.016 25.984,55.016 25.984,55.702 ; C22.1@26.289,55.118 25.984,55.702 ; C22.1@26.415,55.204 25.984,55.702 ; C22.1@26.519,55.318 25.984,55.702
NetAT12_13: AT12.13 C15.1 | length 3.8
  Top Layer w0.381: AT12.13@24.529,57.764 C15.1@25.585,57.764 24.729,57.764 25.56,57.764 AT12.13@24.529,57.764
NetAT21_4: AT21.4 C73.2 | length 23.8
  Top Layer w0.443: AT21.4@15.258,22.391 C73.2@14.42,22.987 ; AT21.4@15.431,22.799 C73.2@14.42,22.987 ; C73.2@14.42,22.987 14.762,22.987 ; C73.2@14.42,22.987 AT21.4@15.367,22.585 ; C73.2@14.445,22.987 AT21.4@15.367,22.382 14.762,22.987 ; C73.2@14.445,22.987 14.762,22.987 ; C73.2@14.445,22.987 14.762,22.987 ; C73.2@14.445,22.987 AT21.4@15.256,22.392 ; C73.2@14.445,22.987 AT21.4@15.433,22.798 ; C73.2@14.445,22.987 AT21.4@15.367,22.585 ; C73.2@14.445,22.987 AT21.4@15.256,22.392 ; C73.2@14.445,22.987 AT21.4@15.433,22.798 ; C73.2@14.445,22.987 AT21.4@15.367,22.585 ; C73.2@14.445,22.987 AT21.4@15.256,22.392 ; C73.2@14.445,22.987 AT21.4@15.433,22.798 ; C73.2@14.445,22.987 AT21.4@15.367,22.585 ; 14.762,22.987 AT21.4@15.217,22.421 ; 14.762,22.987 AT21.4@15.46,22.788 ; 14.762,22.987 AT21.4@15.367,22.585 ; 14.762,22.987 AT21.4@15.217,22.421 ; 14.762,22.987 AT21.4@15.46,22.788 ; 14.762,22.987 AT21.4@15.367,22.585 ; 14.762,22.987 AT21.4@15.217,22.421 ; 14.762,22.987 AT21.4@15.46,22.788 ; 14.762,22.987 AT21.4@15.367,22.585 ; 14.762,22.987 AT21.4@15.217,22.421 ; 14.762,22.987 AT21.4@15.46,22.788 ; 14.762,22.987 AT21.4@15.367,22.585
NetAT22_6: AT22.6 C61.2 | length 3.3
  Top Layer w0.381: C61.2@19.5,20.172 AT22.6@20.429,20.172 19.525,20.172 20.229,20.172 C61.2@19.5,20.172
NetAT22_7: AT22.7 AT22.8 AT22.9 C65.1 | length 9.2
  Top Layer w0.152: C65.1@19.518,17.606 19.812,18.11 ; C65.1@19.661,17.546 19.812,18.11 ; C65.1@19.812,17.424 19.812,18.11 ; C65.1@19.812,17.526 19.812,18.11 ; C65.1@19.963,17.546 19.812,18.11 ; C65.1@20.106,17.606 19.812,18.11 ; AT22.7@21.229,19.172 21.229,18.796 ; AT22.7@21.229,19.372 21.229,18.796 ; AT22.8@21.729,19.172 21.697,18.796 ; AT22.8@21.729,19.372 21.697,19.34 21.697,18.796 ; AT22.9@22.229,19.172 22.225,18.923 ; AT22.9@22.229,19.372 22.225,19.368 22.225,18.923 ; 19.812,18.11 20.371,18.669 21.102,18.669 21.229,18.796 ; 21.229,18.796 21.336,18.689 21.59,18.689 21.697,18.796 ; 21.697,18.796 21.824,18.669 21.971,18.669 22.225,18.923
NetAT22_10: AT22.10 C66.1 | length 6.6
  Top Layer w0.152: C66.1@21.673,17.589 21.971,18.261 ; C66.1@21.819,17.542 21.971,18.261 ; C66.1@21.971,17.424 21.971,18.261 ; C66.1@21.971,17.526 21.971,18.261 ; C66.1@22.123,17.542 21.971,18.261 ; C66.1@22.269,17.589 21.971,18.261 ; AT22.10@22.729,19.172 22.729,18.669 ; AT22.10@22.729,19.372 22.729,18.669 ; 21.971,18.261 22.241,18.531 22.591,18.531 22.729,18.669
NetAT22_11: AT22.11 C67.1 | length 6.5
  Top Layer w0.152: 23.229,18.565 AT22.11@23.229,19.172 ; AT22.11@23.229,19.372 23.229,17.78 23.483,17.526 ; C67.1@24.058,17.23 23.483,17.526 ; C67.1@24.058,17.822 23.483,17.526 ; C67.1@24.112,17.375 23.483,17.526 ; C67.1@24.112,17.677 23.483,17.526 ; C67.1@24.13,17.424 24.028,17.526 23.483,17.526 ; C67.1@24.13,17.526 23.483,17.526
NetAT22_12: AT22.12 C68.1 | length 8
  Top Layer w0.152: AT22.12@23.729,19.172 23.729,18.669 ; AT22.12@23.729,19.372 23.729,18.669 ; C68.1@25.993,17.451 25.984,18.11 ; C68.1@26.147,17.472 25.984,18.11 ; C68.1@26.289,17.424 25.984,17.424 25.984,18.11 ; C68.1@26.289,17.526 25.984,18.11 ; C68.1@26.415,17.612 25.984,18.11 ; C68.1@26.519,17.726 25.984,18.11 ; 23.729,18.669 23.983,18.415 25.679,18.415 25.984,18.11
NetAT22_13: AT22.13 C64.1 | length 3.8
  Top Layer w0.381: AT22.13@24.529,20.172 C64.1@25.585,20.172 24.729,20.172 25.56,20.172 AT22.13@24.529,20.172
NetC12_1: C12.1 U10.4 | length 5.1
  Top Layer w0.508: U10.4@21.493,63.685 C12.1@22.918,63.685 21.768,63.685 22.893,63.685 U10.4@21.493,63.685
NetC13_1: C13.1 J2.1 | length 10.2
  Top Layer w0.443: J2.1@0.762,58.674 C13.1@7.805,58.674 ; J2.1@1.321,58.674 2.854,58.674 ; 6.15,58.674 C13.1@7.78,58.674
NetC13_2: C13.2 U30.3 | length 4.6
  Top Layer w0.443: C13.2@8.705,58.674 U30.3@9.876,58.674 8.73,58.674 9.851,58.674 C13.2@8.705,58.674
NetC14_1: C14.1 U30.6 | length 4.1
  Top Layer w0.443: C14.1@13.52,60.579 C14.1@13.515,60.574 ; C14.1@13.515,60.574 U30.6@12.476,60.574 13.495,60.579 12.501,60.574 C14.1@13.515,60.574
NetC15_2: C15.2 U17.1 | length 4.5
  Top Layer w0.443: C15.2@26.485,57.764 U17.1@29.362,57.764 ; C15.2@26.51,57.764 28.14,57.764
NetC23_1: C23.1 L1.2 L8.2 | length 25.5
  Top Layer w0.443: L8.2@35.298,57.764 36.79,57.764 ; L1.2@37.378,57.388 L8.2@35.485,57.764 ; L1.2@37.378,58.141 L8.2@35.485,57.764 ; L1.2@37.552,57.388 39.445,57.764 ; L1.2@37.552,58.141 39.445,57.764 ; 38.408,57.764 C23.1@40.038,57.764 ; C23.1@40.063,57.764 38.14,57.764 ; L8.2@35.485,57.764 L1.2@37.415,57.764 ; 36.79,57.764 L1.2@37.465,57.764 38.14,57.764 ; 36.79,57.764 37.3,57.404 36.79,57.764 ; 36.79,57.764 37.3,58.125 36.79,57.764 ; 36.79,57.764 L1.2@37.415,57.764 ; 36.79,57.764 L1.2@37.415,57.764 ; L1.2@37.515,57.764 38.14,57.764 ; L1.2@37.515,57.764 39.445,57.764 ; L1.2@37.515,57.764 38.14,57.764 ; 38.14,57.764 37.63,58.125 38.14,57.764 ; 38.14,57.764 37.63,57.404 38.14,57.764
NetC23_2: C23.2 T1.3 | length 10
  Top Layer w0.443: C23.2@40.963,57.764 T1.3@43.815,57.764 ; C23.2@40.988,57.764 42.618,57.764 ; T1.3@43.519,57.487 41.71,57.764 ; T1.3@43.519,58.042 41.71,57.764 ; T1.3@43.54,57.764 41.71,57.764
NetC24_1: C24.1 R2.1 T1.4 | length 34.7
  Top Layer w0.6: 67.941,44.464 68.495,43.91 68.569,43.91 68.58,43.921 ; 68.58,43.921 68.6,43.921 ; 68.58,43.921 R2.1@69.024,43.497 ; 68.6,43.921 R2.1@69.024,43.497 ; 68.6,43.921 R2.1@69.024,43.497 ; 68.6,43.921 R2.1@69.024,43.497 ; R2.1@69.024,43.371 R2.1@69.024,43.497 ; R2.1@69.024,43.371 C24.1@69.786,42.609 R2.1@69.024,43.497 ; R2.1@69.024,43.371 69.768,42.627 R2.1@69.024,43.497
  Top Layer w0.967: T1.4@48.133,57.764 49.403,57.764 ; T1.4@48.408,57.764 49.403,57.764 ; 67.941,44.464 55.779,56.626 ccw(c50.673,51.521) 50.673,58.741 50.38,58.741 49.403,57.764
NetC25_1: C25.1 R2.2 T1.6 | length 35.6
  Top Layer w0.6: 68.715,45.238 69.269,44.684 69.236,44.651 ; 69.236,44.557 R2.2@69.66,44.133 ; 69.236,44.557 69.236,44.651 ; 69.236,44.557 R2.2@69.66,44.133 ; 69.236,44.557 R2.2@69.66,44.133 ; 69.236,44.651 R2.2@69.66,44.133 ; R2.2@69.66,44.133 R2.2@69.786,44.133 ; R2.2@69.66,44.133 C25.1@70.548,43.371 R2.2@69.786,44.133 ; R2.2@69.66,44.133 70.53,43.389 R2.2@69.786,44.133
  Top Layer w0.967: T1.6@48.133,60.812 49.403,60.812 ; T1.6@48.408,60.812 49.403,60.812 ; 68.715,45.238 56.544,57.409 ccw(c50.685,51.55) 50.685,59.836 50.38,59.836 49.403,60.812
NetC55_1: C55.1 R37.1 T3.6 | length 58.2
  Top Layer w0.6: 64.796,38.79 65.588,38.79 65.686,38.693 ; 65.686,38.693 R37.1@66.294,38.693 ; 65.686,38.693 R37.1@66.294,38.693 ; R37.1@66.294,38.693 R37.1@66.294,38.751 ; R37.1@66.294,38.693 C55.1@67.368,38.751 R37.1@66.294,38.751 ; R37.1@66.294,38.693 67.343,38.751 R37.1@66.294,38.751
  Top Layer w0.967: T3.6@17.399,39.767 18.597,39.767 ; 64.796,38.79 19.574,38.79 ; T3.6@17.674,39.767 18.597,39.767 ; T3.6@17.674,39.767 19.574,38.79 ; T3.6@17.674,39.767 18.597,39.767 ; 18.597,39.767 19.574,38.79
NetC56_1: C56.1 R37.2 T3.4 | length 55.3
  Top Layer w0.6: 64.796,37.696 65.588,37.696 65.686,37.793 ; 65.686,37.793 R37.2@66.294,37.793 ; 65.686,37.793 R37.2@66.294,37.793 ; R37.2@66.294,37.735 R37.2@66.294,37.793 ; R37.2@66.294,37.735 C56.1@67.368,37.735 R37.2@66.294,37.793 ; R37.2@66.294,37.735 67.343,37.735 R37.2@66.294,37.793
  Top Layer w0.967: T3.4@17.399,36.719 18.692,36.719 ; T3.4@17.674,36.719 18.692,36.719 ; 64.796,37.696 19.669,37.696 18.692,36.719
NetC58_1: C58.1 J4.1 | length 10.3
  Top Layer w0.443: J4.1@0.762,39.767 C58.1@7.932,39.767 ; J4.1@1.321,39.767 2.854,39.767 ; 6.277,39.767 C58.1@7.907,39.767
NetC58_2: C58.2 R36.1 | length 4
  Top Layer w0.443: R36.1@9.837,39.767 C58.2@8.832,39.767 R36.1@9.837,39.767 ; R36.1@9.837,39.767 8.857,39.767 R36.1@9.837,39.767
NetC62_1: C62.1 R21.1 T2.6 | length 39.4
  Top Layer w0.6: 67.861,33.964 68.415,34.518 ; 68.415,34.518 68.52,34.518 ; 68.415,34.518 R21.1@69.024,34.862 ; 68.52,34.518 68.6,34.438 ; 68.52,34.518 R21.1@69.024,34.862 ; 68.52,34.518 R21.1@69.024,34.862 ; 68.6,34.438 R21.1@69.024,34.862 ; 68.6,34.438 R21.1@69.024,34.862 ; 68.6,34.438 R21.1@69.024,34.862 ; R21.1@69.024,34.862 R21.1@69.024,34.988 ; R21.1@69.024,34.862 C62.1@69.786,35.75 R21.1@69.024,34.988 ; R21.1@69.024,34.862 69.768,35.732 R21.1@69.024,34.988
  Top Layer w0.967: T2.6@48.133,20.172 49.392,20.172 ; 67.861,33.964 54.983,21.086 cw(c50.419,25.651) 50.419,19.196 50.369,19.196 ; T2.6@48.408,20.172 50.369,19.196 ; T2.6@48.408,20.172 49.392,20.172 ; T2.6@48.408,20.172 49.392,20.172 ; 49.392,20.172 50.369,19.196
NetC64_2: C64.2 U18.1 | length 6.3
  Top Layer w0.443: C64.2@26.485,20.172 U18.1@29.362,20.172 27.601,20.172 ; C64.2@26.51,20.172 28.14,20.172
NetC69_1: C69.1 R21.2 T2.4 | length 37.6
  Top Layer w0.6: 68.635,33.19 69.215,33.77 69.215,33.781 ; 69.215,33.781 R21.2@69.66,34.226 ; 69.215,33.781 R21.2@69.66,34.226 ; R21.2@69.66,34.226 R21.2@69.786,34.226 ; R21.2@69.66,34.226 C69.1@70.548,34.988 R21.2@69.786,34.226 ; R21.2@69.66,34.226 70.53,34.97 R21.2@69.786,34.226
  Top Layer w0.967: T2.4@48.133,17.124 49.392,17.124 ; 68.635,33.19 55.757,20.312 cw(c50.419,25.651) 50.419,18.101 50.369,18.101 ; T2.4@48.408,17.124 50.369,18.101 ; T2.4@48.408,17.124 49.392,17.124 ; T2.4@48.408,17.124 49.392,17.124 ; 49.392,17.124 50.369,18.101
NetC70_1: C70.1 L2.2 L7.2 | length 25.5
  Top Layer w0.443: L7.2@35.298,20.172 36.79,20.172 ; L2.2@37.378,19.796 L7.2@35.485,20.172 ; L2.2@37.378,20.549 L7.2@35.485,20.172 ; L2.2@37.552,19.796 39.445,20.172 ; L2.2@37.552,20.549 39.445,20.172 ; 38.408,20.172 C70.1@40.038,20.172 ; C70.1@40.063,20.172 38.14,20.172 ; L7.2@35.485,20.172 L2.2@37.415,20.172 ; 36.79,20.172 L2.2@37.465,20.172 38.14,20.172 ; 36.79,20.172 37.3,19.812 36.79,20.172 ; 36.79,20.172 37.3,20.533 36.79,20.172 ; 36.79,20.172 L2.2@37.415,20.172 ; 36.79,20.172 L2.2@37.415,20.172 ; L2.2@37.515,20.172 38.14,20.172 ; L2.2@37.515,20.172 39.445,20.172 ; L2.2@37.515,20.172 38.14,20.172 ; 38.14,20.172 37.63,20.533 38.14,20.172 ; 38.14,20.172 37.63,19.812 38.14,20.172
NetC70_2: C70.2 T2.1 | length 10
  Top Layer w0.443: C70.2@40.963,20.172 T2.1@43.815,20.172 ; C70.2@40.988,20.172 42.618,20.172 ; T2.1@43.519,19.895 41.71,20.172 ; T2.1@43.519,20.45 41.71,20.172 ; T2.1@43.54,20.172 41.71,20.172
NetC73_1: C73.1 U31.6 | length 4.1
  Top Layer w0.443: U31.6@12.476,22.982 U31.6@12.481,22.987 ; U31.6@12.481,22.987 C73.1@13.52,22.987 12.501,22.982 13.495,22.987 U31.6@12.481,22.987
NetC75_1: C75.1 J5.1 | length 10.2
  Top Layer w0.443: J5.1@0.762,21.082 C75.1@7.805,21.082 ; J5.1@1.321,21.082 2.854,21.082 ; 6.15,21.082 C75.1@7.78,21.082
NetC75_2: C75.2 U31.3 | length 4.6
  Top Layer w0.443: C75.2@8.705,21.082 U31.3@9.876,21.082 8.73,21.082 9.851,21.082 C75.2@8.705,21.082
NetC80_1: C80.1 U5.15 | length 8.5
  Top Layer w0.152: C80.1@72.497,65.587 72.796,66.37 ; C80.1@72.645,65.546 72.796,66.37 ; C80.1@72.796,65.532 72.796,67.443 72.961,67.607 U5.15@72.961,69.312 ; U5.15@72.863,69.304 72.961,68.68 U5.15@73.059,69.304 ; C80.1@72.948,65.546 72.796,66.37 ; C80.1@73.096,65.587 72.796,66.37
NetC81_1: C81.1 U6.15 | length 8.2
  Top Layer w0.152: C81.1@24.384,80.493 26.231,80.493 26.269,80.455 U6.15@27.91,80.455 ; C81.1@24.398,80.341 25.222,80.493 ; C81.1@24.398,80.644 25.222,80.493 ; C81.1@24.439,80.193 25.222,80.493 ; C81.1@24.439,80.792 25.222,80.493 ; U6.15@27.902,80.357 27.278,80.455 U6.15@27.902,80.553
NetC82_1: C82.1 U7.15 | length 8.5
  Top Layer w0.152: C82.1@48.768,78.588 50.679,78.588 50.843,78.423 U7.15@52.548,78.423 ; C82.1@48.782,78.436 49.606,78.588 ; C82.1@48.782,78.739 49.606,78.588 ; C82.1@48.823,78.288 49.606,78.588 ; C82.1@48.823,78.887 49.606,78.588 ; U7.15@52.54,78.325 51.916,78.423 U7.15@52.54,78.521
NetC109_1: C109.1 U36.4 | length 5.1
  Top Layer w0.508: U36.4@21.493,26.101 C109.1@22.918,26.101 21.768,26.101 22.893,26.101 U36.4@21.493,26.101
NetJ6_1: J6.1 R47.1 U29.5 | length 15.9
  Top Layer w0.443: J6.1@0.762,79.478 R47.1@8.948,79.478 ; J6.1@1.321,79.478 2.854,79.478 ; 7.318,79.478 R47.1@8.948,79.478 ; U29.5@8.956,77.881 U29.5@8.948,77.889 ; U29.5@8.956,78.131 R47.1@8.948,79.478 ; U29.5@8.948,77.889 R47.1@8.948,79.478 ; U29.5@8.948,77.889 R47.1@8.948,79.478